# EAGLE board PLLboard (EAGLE 9.4.2)
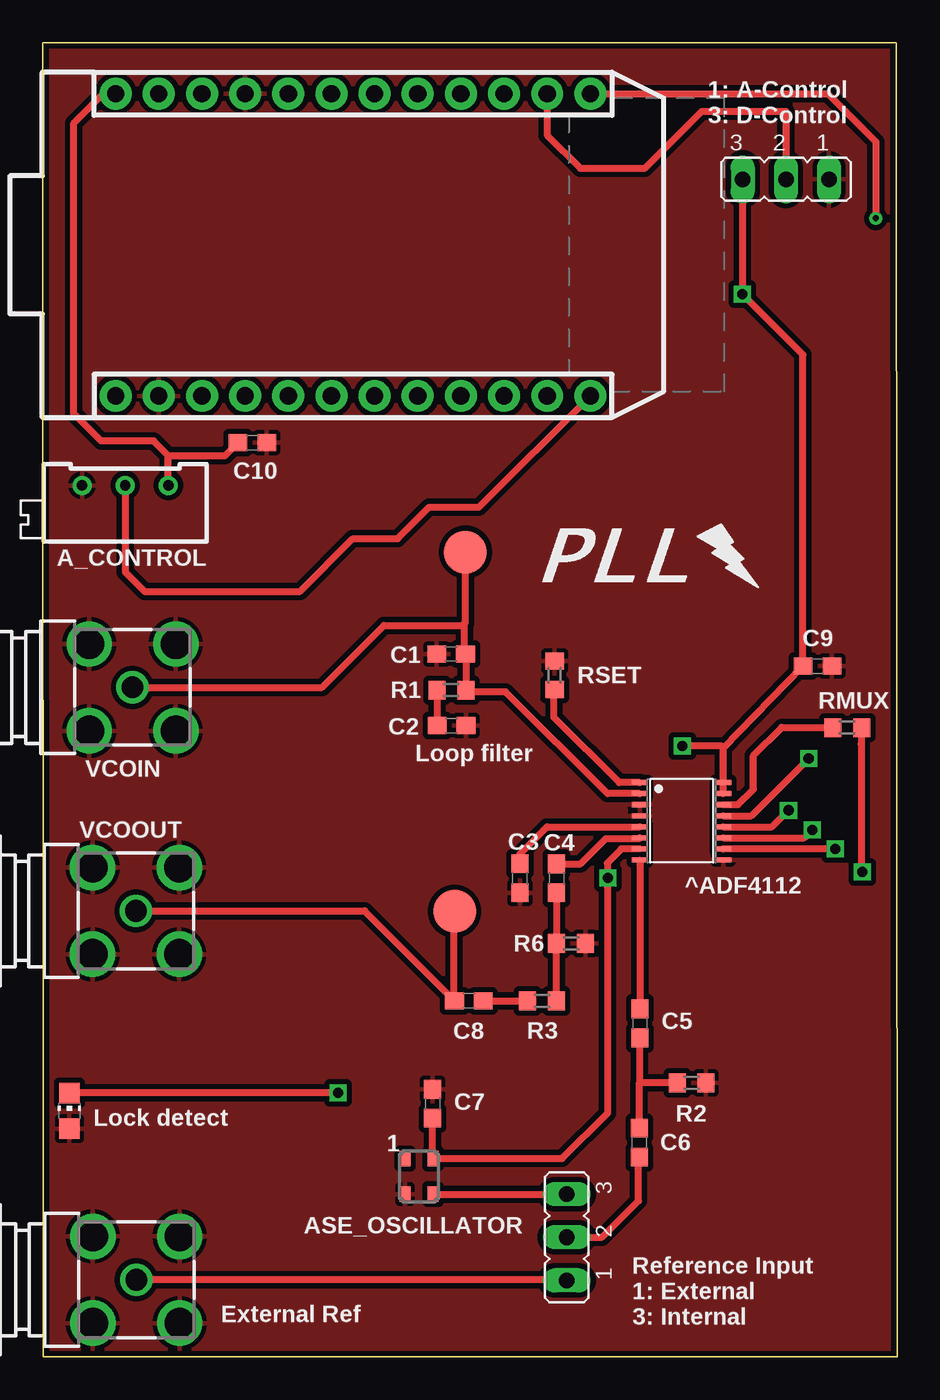
[diagram p0: board, top side]
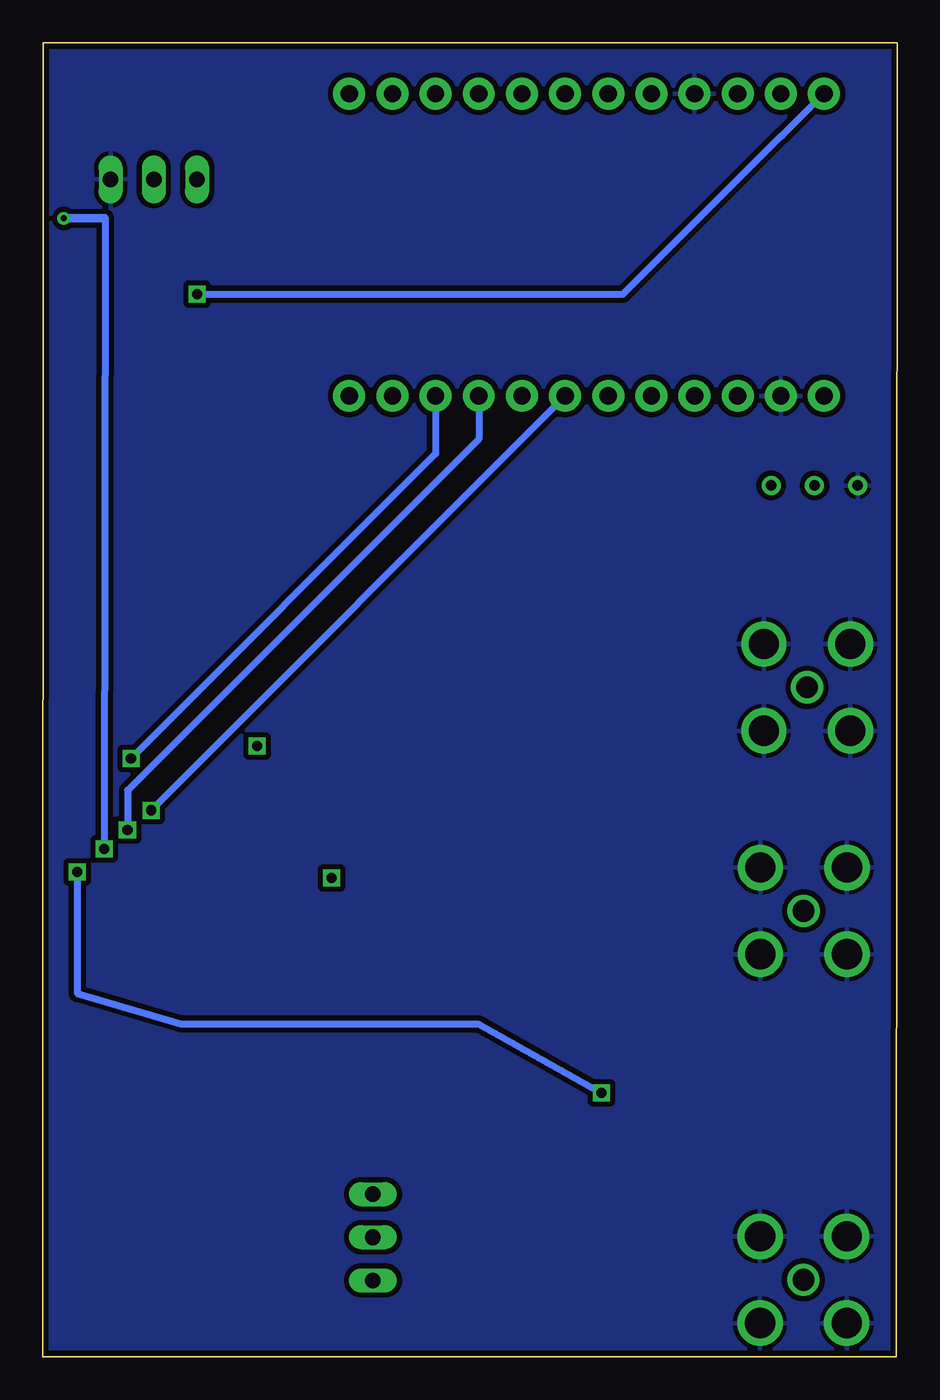
[diagram p1: board, bottom side, seen from below]

Size 50.3 x 77.35 mm. Coordinates in mm from the lower left corner, seen from the top.
Outline: 0.05,0 50.3,0 50.25,77.35 0,77.35 0.05,0
Copper layers (1*16): Top 0.035mm / dielectric 1.5mm / Bottom 0.035mm
Design rules "default *": minimum track width 10mil, minimum drill 10mil, track to track 7mil, track to pad 7mil, pad to pad 7mil, via to via 7mil, smd to smd 7mil, copper to edge 10mil, drill to drill 8mil, minimum pad ring 10mil, minimum via ring 8mil, stop-mask expansion 4mil, vias tented up to drill 0mil, thermal gap 10mil
Net classes: 1 standard: width 0.61 mm, clearance 0.254 mm

## Footprints (pad centres in the part's own frame; a part is rotated, then mirrored left to right if it is on the bottom)
RTRIM64X = drill 0.61: 1 1.27,-2.54; 2 1.27,0; 3 1.27,2.54
ADF4112 = smd 0.3 x 0.95: 1 0,0; 2 0.65,0; 3 1.3,0; 4 1.95,0; 5 2.6,0; 6 3.25,0; 7 3.9,0; 8 4.55,0; 9 4.55,4.9; 10 3.9,4.9; 11 3.25,4.9; 12 2.6,4.9; 13 1.95,4.9; 14 1.3,4.9; 15 0.65,4.9; 16 0,4.9
ASE = smd 0.9 x 0.65: 1 -1.05,-0.825; 2 1.05,-0.825; 3 1.05,0.825; 4 -1.05,0.825
C0603 = smd 1.1 x 1: 1 -0.85,0; 2 0.85,0
BU-SMA-G = drill 1.27: 1 0,0 | drill 1.778: 2 -2.55,2.55; 3 2.55,2.55; 4 2.55,-2.55; 5 -2.55,-2.55
JP2 = drill 0.914 long: 1 -2.54,0; 2 0,0; 3 2.54,0
CHIP-LED0805 = smd 1.2 x 1.2: A 0,-1.05; C 0,1.05
PHOTON = drill 1.016 pad 1.88: 1 1.27,32.258; 2 1.27,29.718; 3 1.27,27.178; 4 1.27,24.638; 5 1.27,22.098; 6 1.27,19.558; 7 1.27,17.018; 8 1.27,14.478; 9 1.27,11.938; 10 1.27,9.398; 11 1.27,6.858; 12 1.27,4.318; 13 19.05,4.318; 14 19.05,6.858; 15 19.05,9.398; 16 19.05,11.938; 17 19.05,14.478; 18 19.05,17.018; 19 19.05,19.558; 20 19.05,22.098; 21 19.05,24.638; 22 19.05,27.178; 23 19.05,29.718; 24 19.05,32.258
R0603 = smd 1 x 1.1: 1 -0.85,0; 2 0.85,0
B2,54 = smd 2.54 x 2.54: TP 0,0

## Placement (x,y rotation side)
A_CONTROL  [RTRIM64X]  4.87,50.02 90 top
ADF4112  [ADF4112]  35.16,33.8 270 top
ASE_OSCILLATOR  ASE  [ASE]  22.16,10.63 270 top
C1  270p  [C0603]  24.05,41.37 180 top
C2  1.20n  [C0603]  24.08,37.15 180 top
C3  100p  [C0603]  28.1,28.17 90 top
C4  100p  [C0603]  30.26,28.17 270 top
C5  1n  [C0603]  35.15,19.63 270 top
C6  1n  [C0603]  35.12,12.62 270 top
C7  0.1u  [C0603]  22.95,14.9 270 top
C8  100p  [C0603]  25.1,20.97 0 top
C9  0.1u  [C0603]  45.61,40.65 180 top
C10  0.1u  [C0603]  12.35,53.8 180 top
EXTERNAL_REFIN  BU-SMA-G  [BU-SMA-G]  5.52,4.54 180 top
JP1  [JP2]  43.75,69.3 180 top
JP2  [JP2]  30.85,7.04 90 top
LED1  [CHIP-LED0805]  1.59,14.48 0 top
MICROCONTOLLER  PHOTON_WITH_HEADERS  [PHOTON]  36.56,55.29 90 top
R1  15k  [R0603]  24.06,39.24 0 top
R2  51  [R0603]  38.2,16.14 180 top
R3  18  [R0603]  29.41,20.96 180 top
R6  51  [R0603]  31.11,24.34 180 top
RMUX  1k  [R0603]  47.36,37.03 180 top
RSET  4.7k  [R0603]  30.14,40.11 90 top
VCO_IN  PTR1B2,54  [B2,54]  24.89,47.36 0 top
VCO_OUT  PTR1B2,54  [B2,54]  24.26,26.22 0 top
VCOIN  BU-SMA-G  [BU-SMA-G]  5.3,39.4 180 top
VCOOUT  BU-SMA-G  [BU-SMA-G]  5.5,26.25 180 top

## Library data of the parts
A_CONTROL R1-R3 R6 RMUX RSET = rcl
ADF4112 = ADF4112
ASE_OSCILLATOR = crystal; OC_FARNELL: unknown; OC_NEWARK: unknown
C1-C10 = eagle-ltspice; SPICEMODEL: NONE; SPICEPREFIX: C
EXTERNAL_REFIN VCOIN VCOOUT = con-coax; OC_FARNELL: unknown; OC_NEWARK: unknown
JP1 JP2 = jumper
LED1 = led
MICROCONTOLLER = Spark
VCO_IN VCO_OUT = testpad

## Nets
GND: A_CONTROL.3 ADF4112.3 ADF4112.4 ADF4112.9 ASE_OSCILLATOR.2 C1.2 C2.1 C3.1 C7.1 C9.1 C10.1 EXTERNAL_REFIN.2 EXTERNAL_REFIN.3 EXTERNAL_REFIN.4 EXTERNAL_REFIN.5 JP1.1 LED1.A MICROCONTOLLER.2 MICROCONTOLLER.21 R2.1 R6.1 RSET.2 VCOIN.2 VCOIN.3 VCOIN.4 VCOIN.5 VCOOUT.2 VCOOUT.3 VCOOUT.4 VCOOUT.5
N$1: ADF4112.12 MICROCONTOLLER.7
N$2: ADF4112.11 MICROCONTOLLER.9
N$3: ADF4112.13 MICROCONTOLLER.10
N$4: ADF4112.1 RSET.1
N$5: C2.2 R1.1
N$6: EXTERNAL_REFIN.1 JP2.1
N$7: ASE_OSCILLATOR.3 JP2.3
N$8: ADF4112.8 C5.1
N$9: C5.2 C6.1 R2.2
N$10: ADF4112.5 C3.2
N$11: ADF4112.6 C4.1
N$12: C8.1 VCO_OUT.TP VCOOUT.1
N$13: A_CONTROL.2 MICROCONTOLLER.12
N$14: JP1.2 MICROCONTOLLER.14
N$16: C8.2 R3.2
N$17: C4.2 R3.1 R6.2
N$18: ADF4112.14 RMUX.2
N$19: LED1.C RMUX.1
N$21: A_CONTROL.1 ADF4112.15 ADF4112.16 C9.2 C10.2 JP1.3 MICROCONTOLLER.24
N$25: ADF4112.10 MICROCONTOLLER.13
N$26: ADF4112.2 C1.1 R1.2 VCO_IN.TP VCOIN.1
N$27: C6.2 JP2.2
S$1: ADF4112.7 ASE_OSCILLATOR.4 C7.2
VBAT: MICROCONTOLLER.22
VIN: MICROCONTOLLER.1

## Tracks (layer width: path | path; a pad name or v marks a point on that pad's centre or on a via)
GND
  pour Top (isolate 0.305): 0,0.05 0,77.45 50.3,77.45 50.3,0.05
  pour Bottom (isolate 0.305): 0,0.1 -0.05,77.35 50.25,77.35 50.3,0.05
N$1  (via drill 0.6)
  Top 0.406: ADF4112.12 42.94,31.2 v43.91,32.17
  Bottom 0.406: MICROCONTOLLER.7 19.54,56.54 v43.91,32.17
N$2  (via drill 0.6)
  Top 0.406: ADF4112.11 44.83,30.55 v45.3,31.02
  Bottom 0.406: v45.3,31.02 45.3,33.34 24.62,54.02 MICROCONTOLLER.9
N$3  (via drill 0.6)
  Top 0.406: ADF4112.13 41.72,31.85 v45.09,35.22
  Bottom 0.406: MICROCONTOLLER.10 27.16,53.15 v45.09,35.22
N$4
  Top 0.406: ADF4112.1 33.94,33.8 30.1,37.64 30.1,39.23 RSET.1
N$5
  Top 0.406: R1.1 23.21,37.11 C2.2
N$6
  Top 0.254: JP2.1 30.85,4.54 30.81,4.54
  Top 0.406: 30.81,4.54 EXTERNAL_REFIN.1
N$7
  Top 0.406: ASE_OSCILLATOR.3 JP2.3
N$8
  Top 0.406: ADF4112.8 35.16,20.5 C5.1
N$9
  Top 0.406: C5.2 35.13,18.76 35.13,16.09 | C6.1 35.1,13.48 35.1,16.06 35.13,16.09 | R2.2 35.18,16.14 35.13,16.09
N$10
  Top 0.406: C3.2 28.1,29.6 29.7,31.2 ADF4112.5
N$11
  Top 0.406: C4.1 31.67,29.02 33.15,30.5 35.11,30.5 ADF4112.6
N$12
  Top 0.254: C8.1 24.23,20.97 24.23,21.2
  Top 0.406: VCO_OUT.TP 24.23,25.2 24.23,21.2 | VCOOUT.1 18.97,26.25 C8.1
N$13
  Top 0.406: MICROCONTOLLER.12 25.69,50 22.75,50 20.9,48.15 18.25,48.15 15.15,45.05 6,45.05 4.87,46.18 A_CONTROL.2
N$14
  Top 0.406: MICROCONTOLLER.14 29.7,71.9 31.65,69.95 35.45,69.95 38.8,73.3 43.75,73.3 JP1.2
N$16
  Top 0.406: C8.2 28.55,20.97 R3.2
N$17
  Top 0.254: C4.2
  Top 0.406: R3.1 R6.2 | R6.2 | C4.2 R6.2
N$18
  Top 0.406: ADF4112.14 40.94,32.5 41.85,33.41 41.85,35.4 43.5,37.05 46.49,37.05 RMUX.2
N$19  (via drill 0.6)
  Top 0.254: 48.19,36.08 48.19,36.03
  Top 0.406: RMUX.1 48.19,36.08 | 48.19,36.03 48.19,28.61 v48.25,28.55 | v17.4,15.55 1.6,15.55 LED1.C
  Bottom 0.406: v48.25,28.55 48.25,21.4 42.15,19.6 24.64,19.6 v17.4,15.55
N$21  (via drill 0.6)
  Top 0.254: 40.06,35.85 40.06,35.96 39.95,35.96
  Top 0.406: ADF4112.15 ADF4112.16 40.06,35.85 C9.2 44.76,58.97 v41.19,62.54 41.19,69.95 JP1.3 | 39.95,35.96 v37.66,35.96 | MICROCONTOLLER.24 3.59,74.34 1.85,72.6 1.85,55.5 3.45,53.9 6.55,53.9 7.41,53.04 | A_CONTROL.1 7.41,53.04 | 7.41,53.04 10.74,53.04 C10.2
  Bottom 0.406: v41.19,62.54 16.15,62.54 6.83,71.86 6.79,71.86 MICROCONTOLLER.24
N$25  (via drill 0.35, 0.6)
  Top 0.406: v46.66,29.89 ADF4112.10 | MICROCONTOLLER.13 46.21,74.34 49.05,71.5 v49.05,67
  Bottom 0.254: 46.66,67 46.61,67.05
  Bottom 0.406: 46.61,67.05 v46.66,29.89
  Bottom 0.508: v49.05,67 46.66,67
N$26
  Top 0.254: C1.1 24.84,41.37
  Top 0.406: C1.1 24.91,41.37 R1.2 24.91,39.14 27.26,39.14 33.25,33.15 ADF4112.2 | 24.84,41.37 24.84,43.15 | VCO_IN.TP 24.89,43.2 24.84,43.15 | VCOIN.1 16.45,39.4 20.1,43.05 24.74,43.05 24.84,43.15
N$27
  Top 0.406: JP2.2 32.93,7.04 35.08,9.19 35.08,11.73 C6.2
S$1  (via drill 0.6)
  Top 0.406: ADF4112.7 34.07,29.9 33.24,29.07 33.24,28.23 v33.28,28.19 33.25,28.16 33.25,14.35 30.58,11.68 ASE_OSCILLATOR.4 22.95,11.68 C7.2

## Text on the board
tPlace: 1: A-Control / 3: D-Control | Loop filter | ^ADF4112 | Lock detect | 1 | External Ref | Reference Input / 1: External / 3: Internal